# Altium PCB PCB1.PcbDoc
Units mm, origin at the board's own origin, x right, y up, seen from the top; angles counter-clockwise.
Board outline 33.08 x 42.55 mm, 4 copper layers (L1(sig), L2(GND), L3(GND), L4(sig)), stack 1.591 mm thick; 53 components, 42 nets, 205 pads, 117 vias.
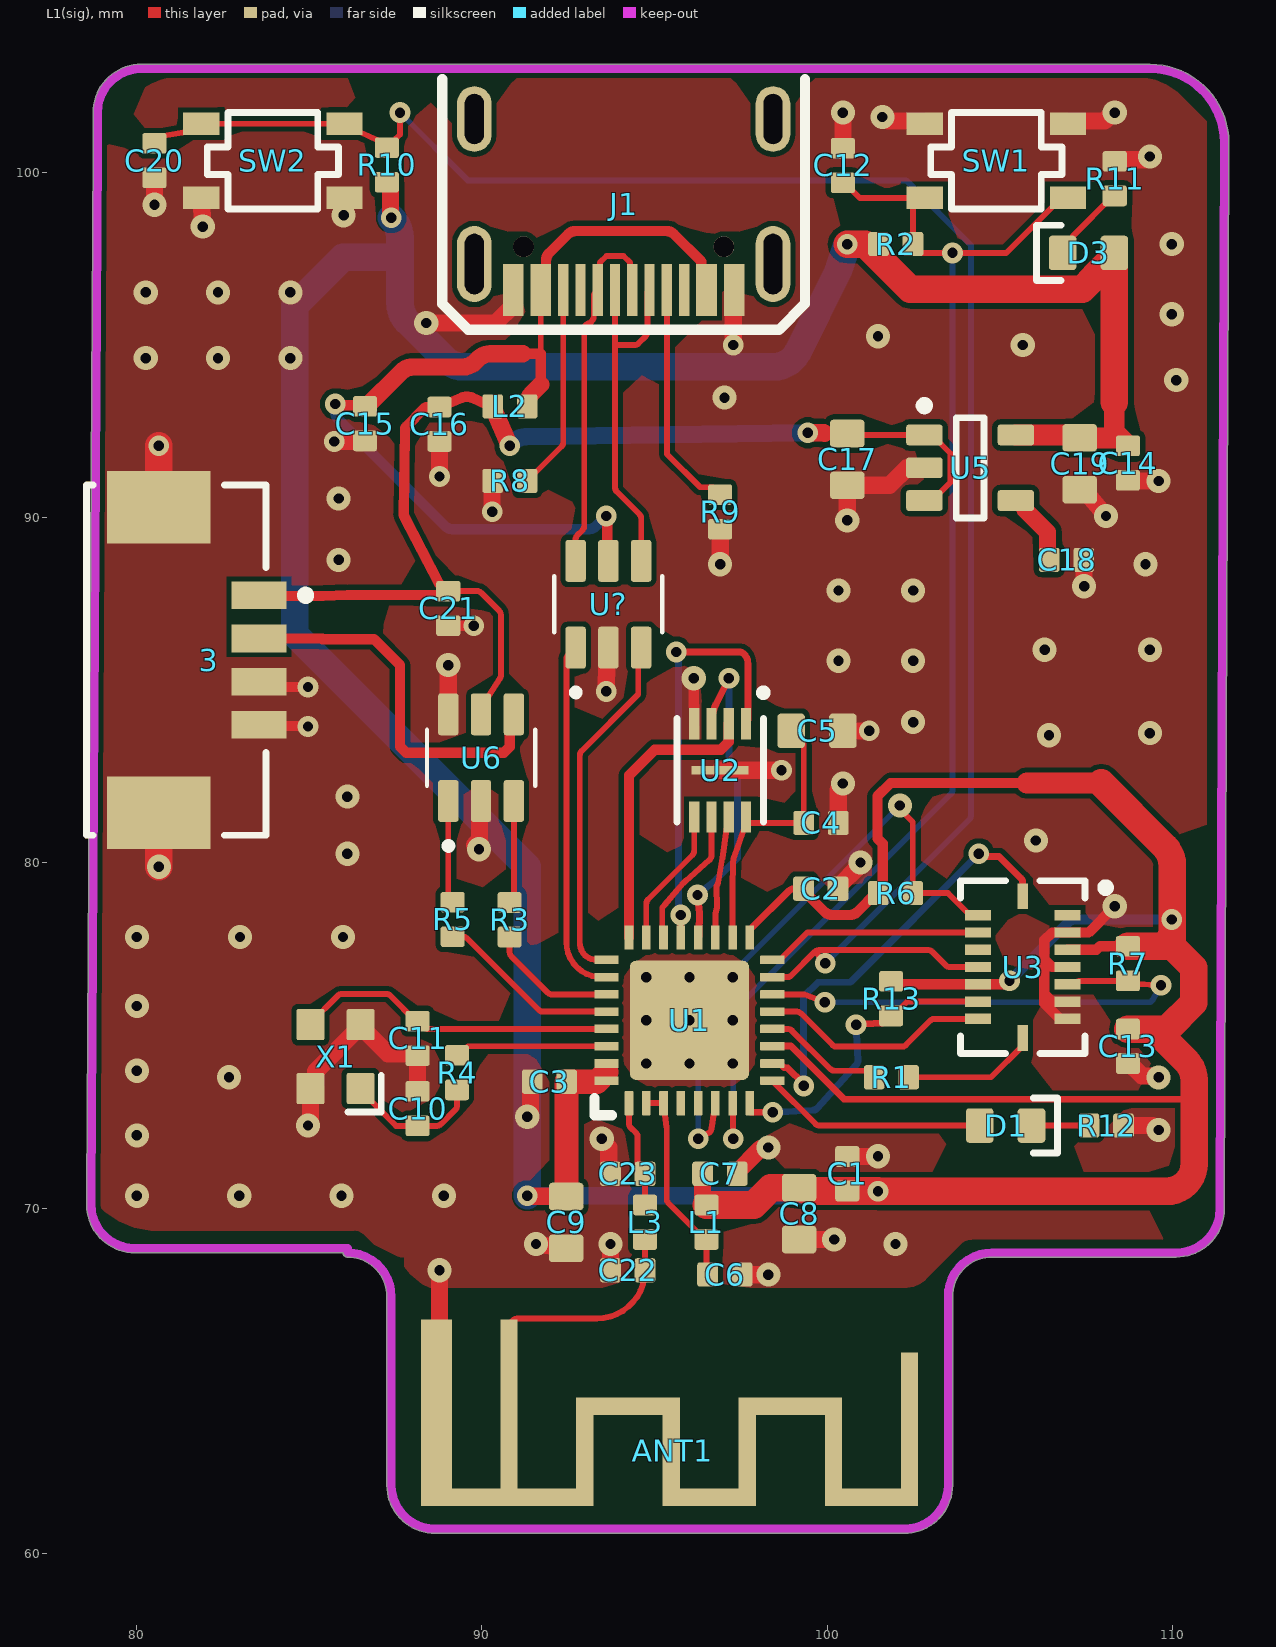
[diagram p0: L1(sig) view]
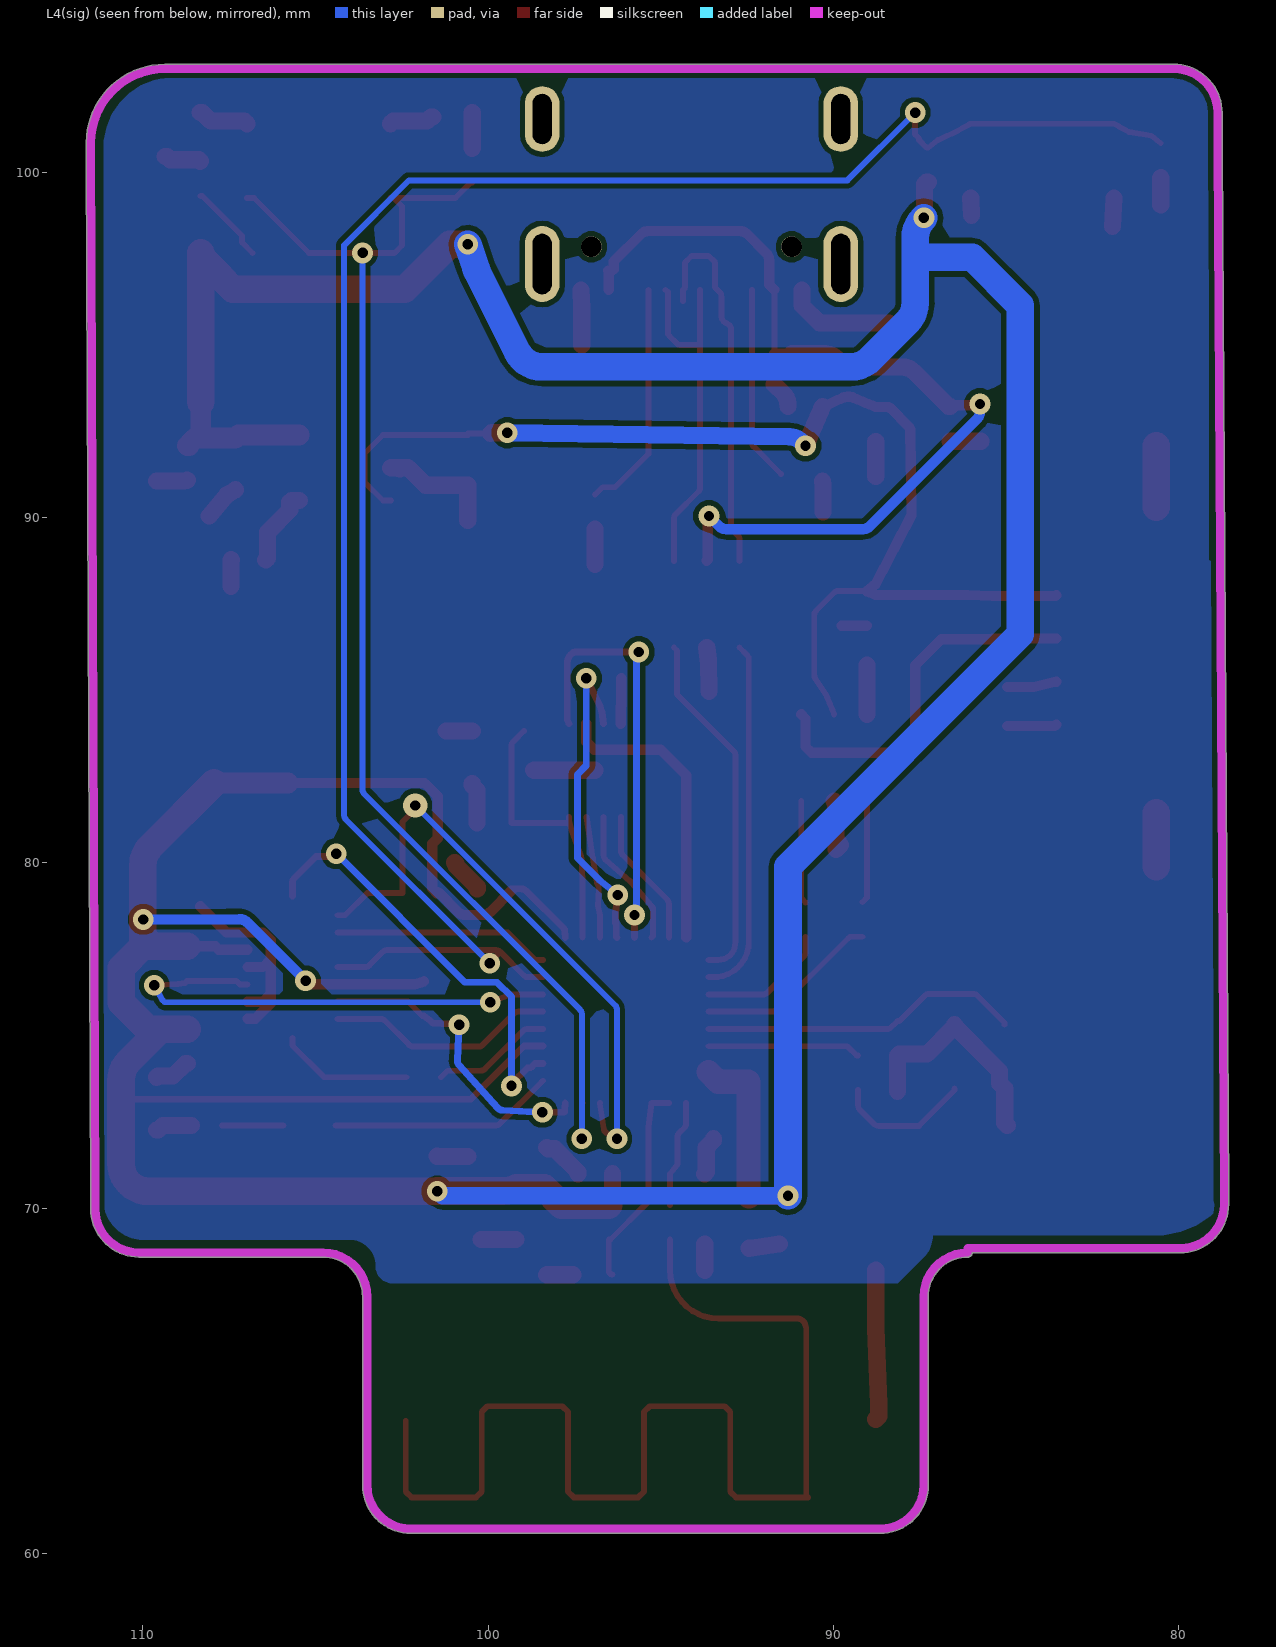
[diagram p1: L4(sig) view, seen from below]
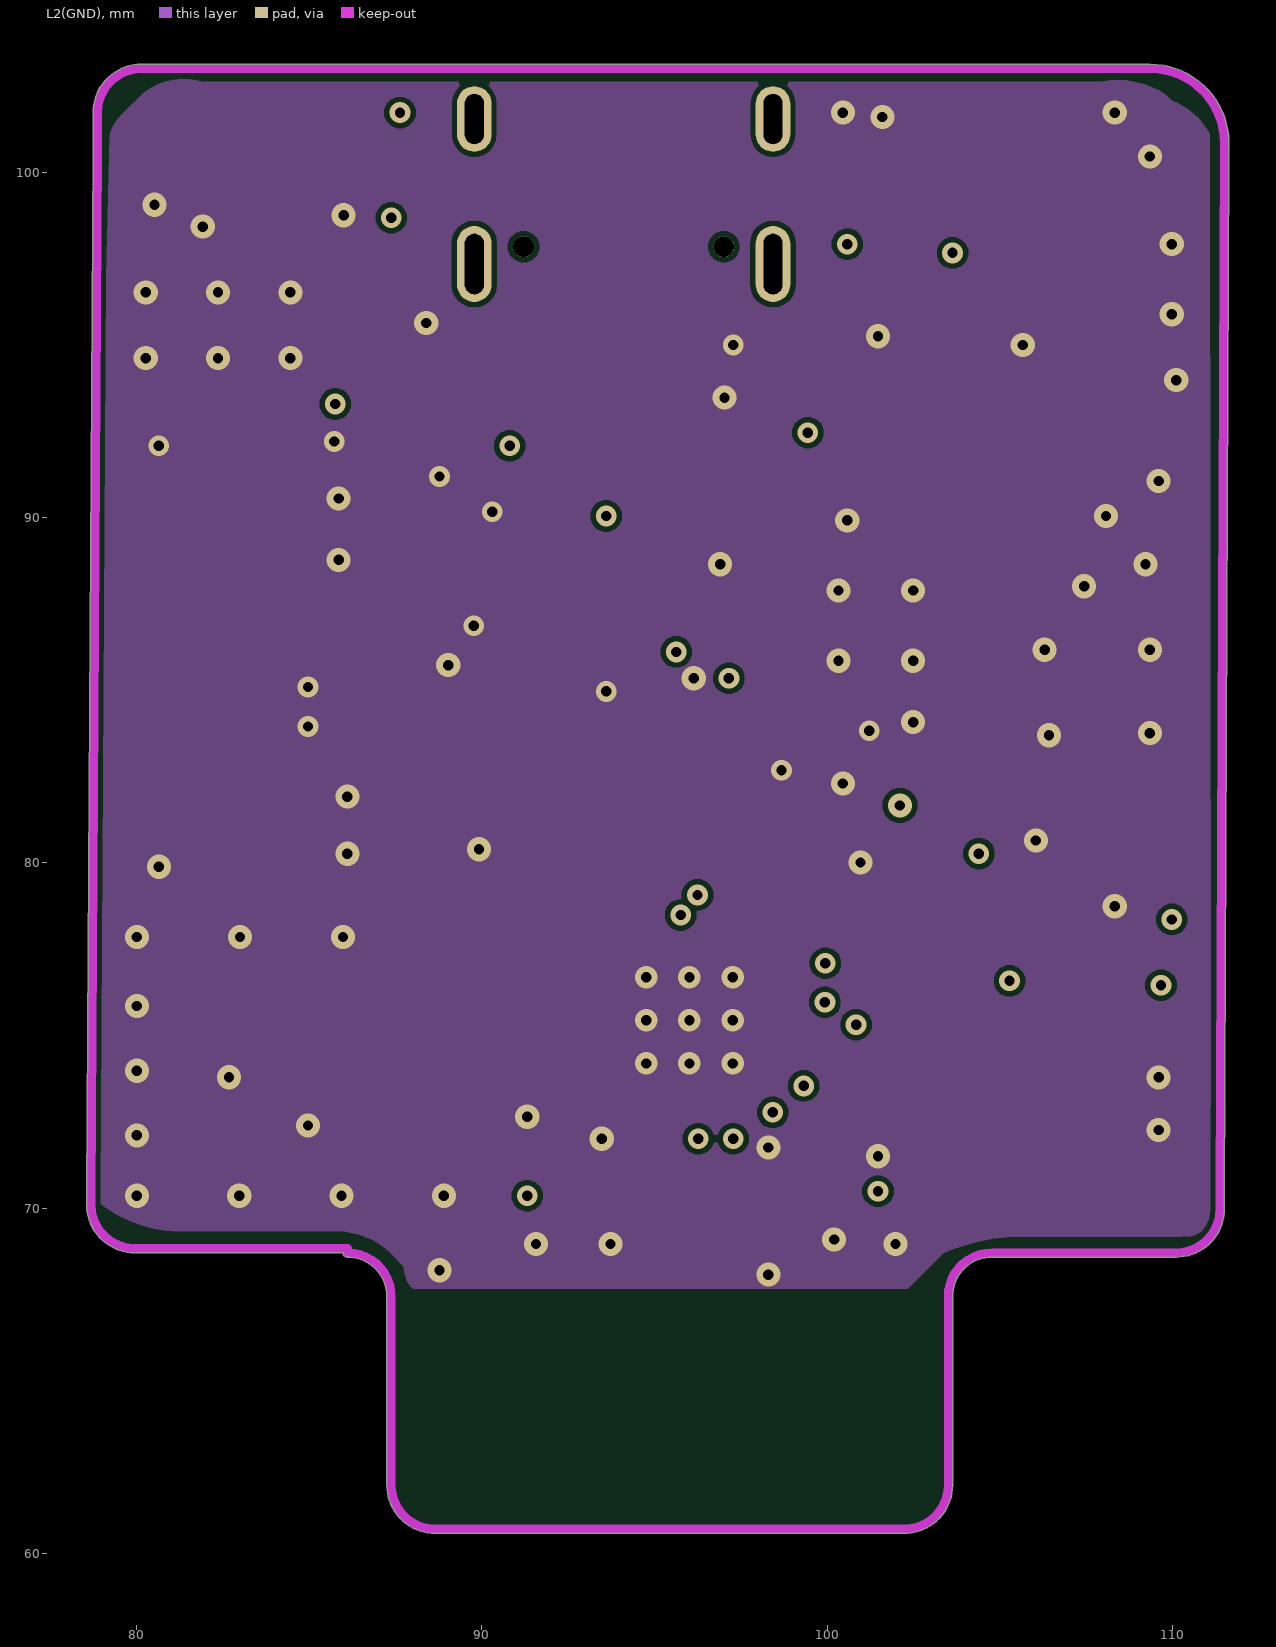
[diagram p2: L2(GND)]
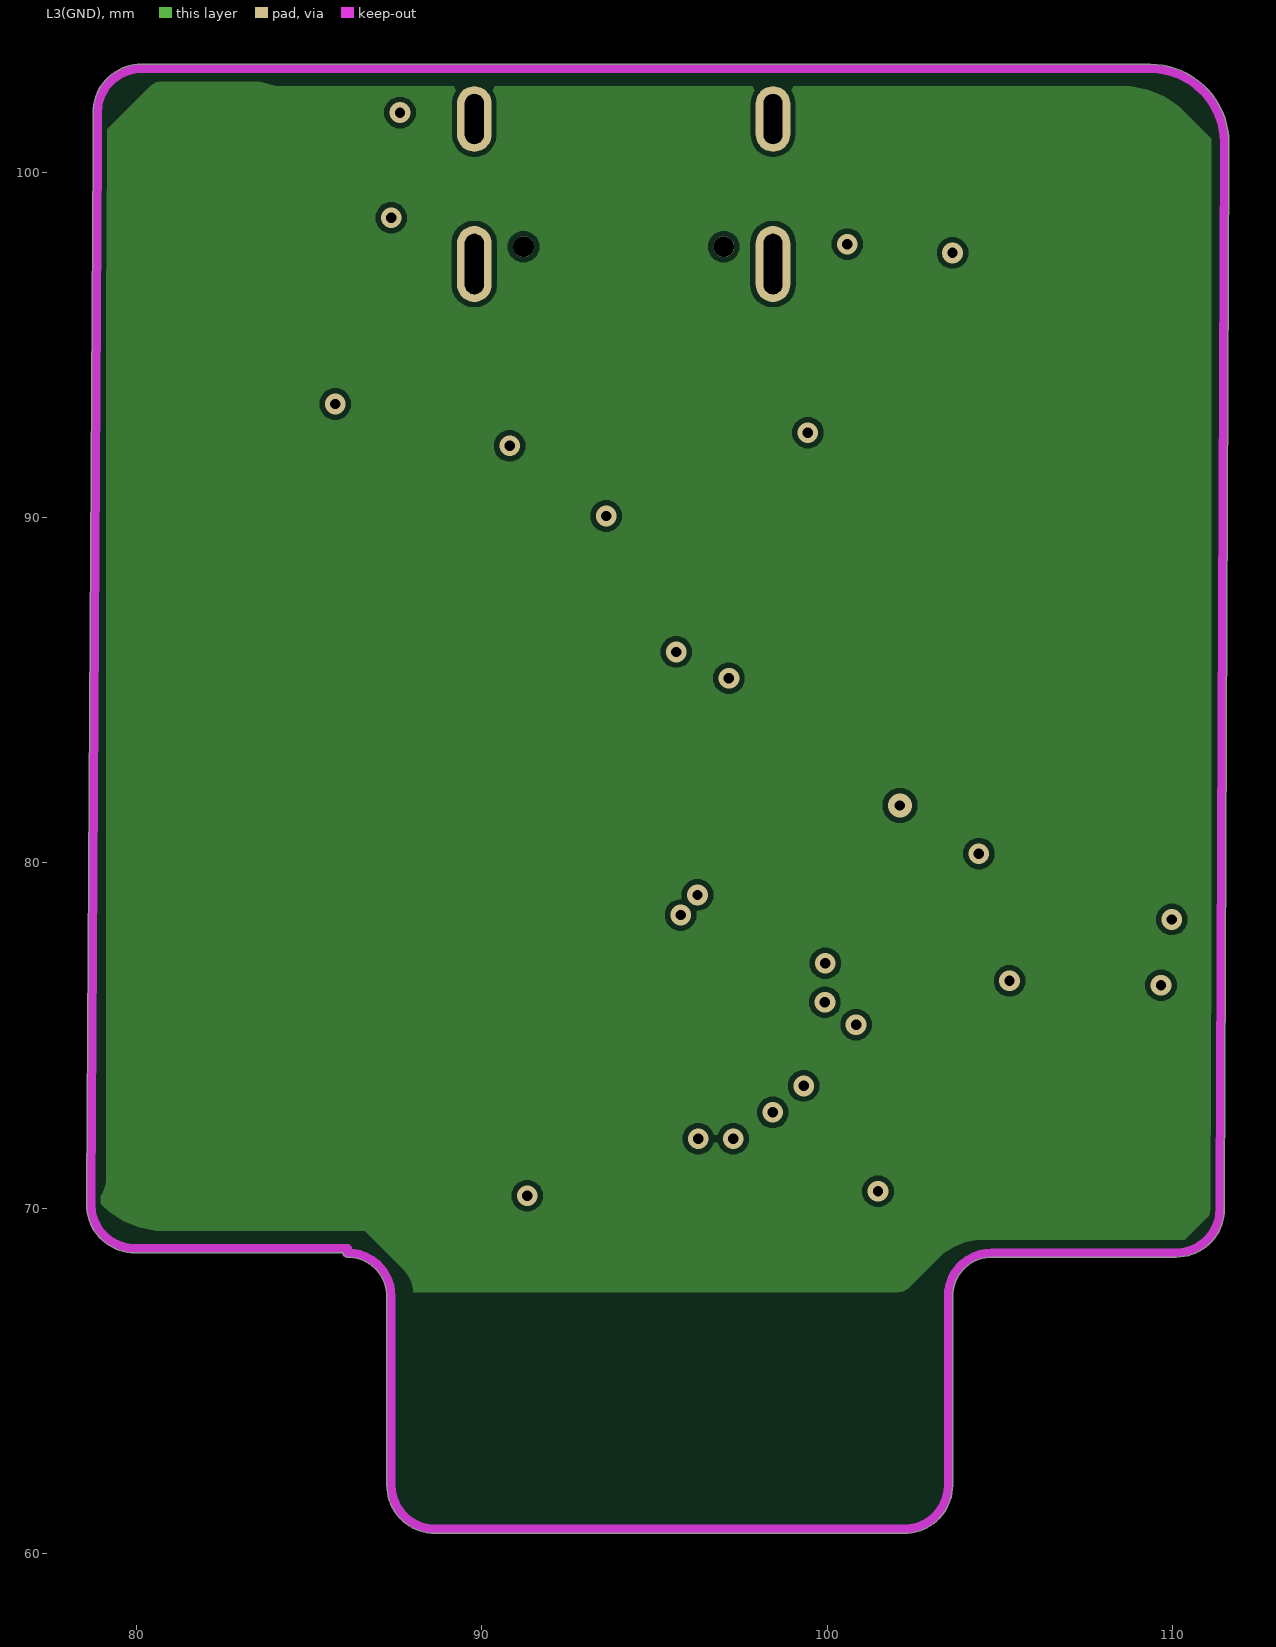
[diagram p3: L3(GND)]
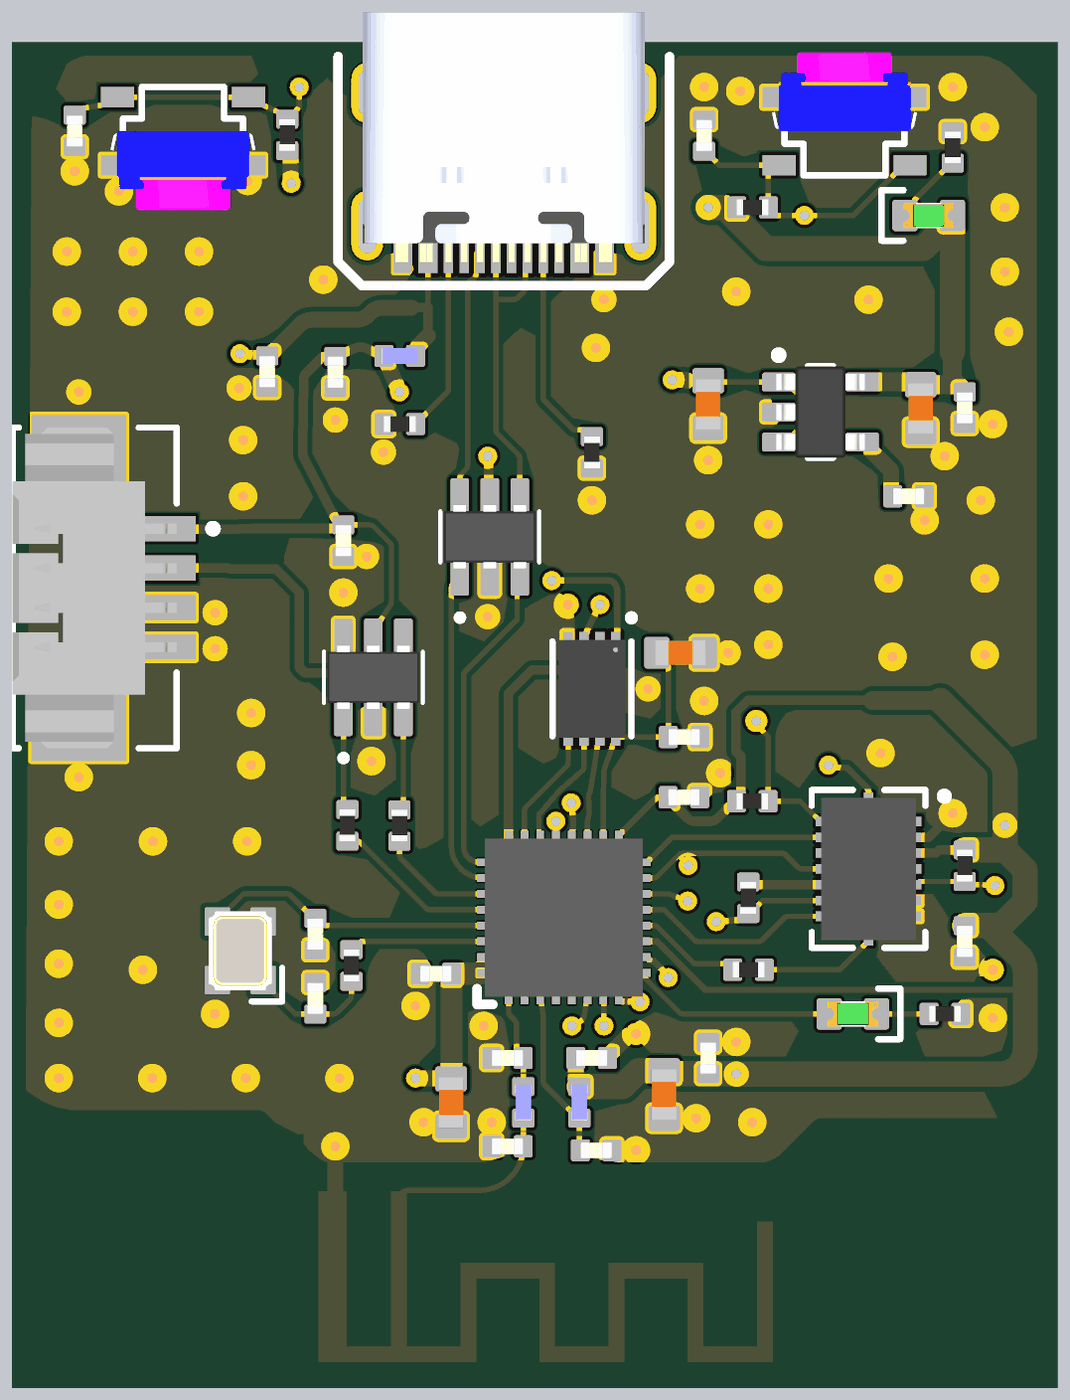
[diagram p4: 3D render of the assembled board from above, using the file's embedded part models]

## Layer stack, top to bottom
Top Solder: solder mask 0.0254, SM-001, Dk 4
L1(sig): signal copper 0.035
Dielectric 1: prepreg 0.2104, PP-017, Dk 4.6
L2(GND): signal copper 0.0175
Dielectric 3: core 1.065, Core-039, Dk 4.6
L3(GND): signal copper 0.0175
Dielectric 5: prepreg 0.2104, PP-017, Dk 4.6
L4(sig): signal copper 0.035
Bottom Solder: solder mask 0.0254, SM-001, Dk 4

## Board outline
79.949,68.707 85.979,68.707 ccw(c86.106,68.707) 86.106,68.58 cw(c86.106,67.437) 87.249,67.437 87.249,61.976 ccw(c88.646,61.976) 88.646,60.579 102.235,60.579 ccw(c102.235,61.976) 103.632,61.976 103.632,67.437 cw(c104.775,67.437) 104.775,68.58 110.108,68.58 ccw(c110.108,69.977) 111.505,69.977 111.505,70.357 111.631,100.434 111.633,100.457 111.633,100.847 ccw(c109.356,100.847) 109.356,103.124 80.137,103.124 ccw(c80.137,101.727) 78.74,101.727 78.74,100.617 78.552,70.42 78.552,70.419 78.552,70.104 ccw(c79.949,70.104)

## Design rules (kind name [scope] priority, off if disabled: settings)
Clearance [All] p1: gap=0.15 ignorepadtopadclearanceinfootprint=FALSE
DiffPairsRouting [All] p1: maxlimit=0.254 minlimit=0.22 mostfreqgap=0.254 toplayer_maxgap=0.22 toplayer_prefgap=0.22 toplayer_minwidth=0.17 toplayer_maxwidth=0.17 toplayer_prefwidth=0.17 midlayer1_mingap=0.254 midlayer1_minwidth=0.381 midlayer1_maxwidth=0.381 midlayer1_prefwidth=0.381 midlayer2_mingap=0.254 midlayer2_minwidth=0.381 midlayer2_maxwidth=0.381 midlayer2_prefwidth=0.381 bottomlayer_maxgap=0.22 bottomlayer_prefgap=0.22 bottomlayer_minwidth=0.17 bottomlayer_maxwidth=0.17 bottomlayer_prefwidth=0.17 maxuncoupledlength=12.7
PolygonConnect [All] p1: connectstyle=Direct reliefconductorwidth=0.254 reliefentries=4 polygonreliefangle="90 Angle" airgapwidth=0.254
RoutingVias [All] p1: holewidth=0.25 width=0.6 viastyle="Through Hole" minholewidth=0.25 minwidth=0.6 maxholewidth=0.4 maxwidth=0.8
SolderMaskExpansion [All] p1: expansion=0.102 istentingtop=FALSE
UnRoutedNet [All] p1: checkbadconnections=TRUE
Width [All] p1: maxlimit=1 minlimit=0.15 preferedwidth=0.2
28 further rules are at their usual default settings.

## Classes and differential pairs
differential pair class DIFF_USB: MCU_USB_D
differential pair class DIFF_USB_2: USB_D
differential pair USB_D: +USB_D_P -USB_D_N
differential pair MCU_USB_D: +MCU_USB_D_P -MCU_USB_D_N

## Components (designator, comment, footprint, x,y, rotation, side; value= is the part's Value field where it differs from the comment)
3 "53261-0471" MOLEX-53261-0471_V 82.095,85.872 r270 top (schematic designator P1)
ANT1 "PCB Antenna 2.4GHz 50Ohm" ANT_IFA_USB_2_4GHZ_50R 88.683,66.772 r0 top
C1 "100n" CAP_0402 100.584,70.993 r270 top
C2 "100n" CAP_0402 99.814,79.248 r180 top
C3 "100n" CAP_0402 91.956,73.66 r0 top
C4 "100n" CAP_0402 99.822,81.153 r180 top
C5 "10u" CAP_0603 99.707,83.82 r180 top
C6 "100n" CAP_0402 97.036,68.072 r180 top
C7 "100n" CAP_0402 96.893,70.993 r180 top
C8 "10u" CAP_0603 99.187,69.838 r90 top
C9 "10u" CAP_0603 92.44,69.584 r90 top
C10 "10P" CAP_0402 88.138,72.882 r270 top
C11 "10P" CAP_0402 88.138,74.914 r90 top
C12 "100n" CAP_0402 100.457,100.195 r270 top
C13 "100n" CAP_0402 108.712,74.684 r90 top
C14 "100n" CAP_0402 108.712,91.575 r90 top
C15 "100n" CAP_0402 86.614,92.718 r90 top
C16 "100n" CAP_0402 88.773,92.702 r90 top
C17 "10u" CAP_0603 100.584,91.682 r90 top
C18 "100n" CAP_0402 106.934,88.773 r180 top
C19 "10u" CAP_0603 107.315,91.555 r90 top
C20 "100n" CAP_0402 80.518,100.338 r90 top
C21 "100n" CAP_0402 89.027,87.368 r270 top
C22 "3p3" CAP_0402 94.226,68.199 r0 top
C23 "3p3" CAP_0402 94.226,70.993 r0 top
D1 "GREEN" LED_0603_GREEN 105.168,72.39 r180 top
D3 "GREEN" LED_0603_GREEN 107.569,97.663 r0 top
J1 "TYPE-C-31-M-12" TYPE-C-31-M-12 94.107,99.441 r180 top
L1 "2n2" IND_0402 96.504,69.588 r90 top
L2 "2n2" IND_0402 90.813,93.218 r180 top
L3 "2n2" IND_0402 94.726,69.588 r90 top
R1 "22R" RES_0402 101.862,73.787 r180 top
R2 "5k1" RES_0402 101.989,97.917 r180 top
R3 "440R" RES_0402 90.805,78.351 r270 top
R4 "22R" RES_0402 89.281,73.922 r270 top
R5 "440R" RES_0402 89.154,78.359 r270 top
R6 "5k" RES_0402 101.981,79.121 r180 top
R7 "5k" RES_0402 108.712,77.081 r90 top
R8 "5k" RES_0402 90.813,91.059 r0 top
R9 "5k" RES_0402 96.901,90.162 r90 top
R10 "5k1" RES_0402 87.249,100.211 r270 top
R11 "1K" RES_0402 108.331,99.814 r270 top
R12 "1K" RES_0402 108.085,72.39 r180 top
R13 "5k" RES_0402 101.854,76.065 r90 top
SW1 "SKRPANE010" SKRPANE010 104.902,100.33 r0 top
SW2 "SKRPANE010" SKRPANE010 83.947,100.33 r180 top
U1 "ESP32-C3" QFN32-5x5 96.012,75.438 r90 top
U2 "W25Q16JVUXIQ" USON-8-2X3MM 96.901,82.677 r270 top
U3 "BMI055" BMI088 105.664,76.98 r270 top
U5 "SPX3819M5-L-3-3/TR" SOT-23-5 104.14,91.44 r0 top
U6 "USBLC6-2SC6" SOT95P280X145-6N 89.977,83.043 r90 top
U? "USBLC6-2SC6" SOT95P280X145-6N 93.665,87.488 r90 top
X1 "40MHZ" XTAL_2520 85.762,74.386 r90 top

## Footprints (in the part's own frame and the unit in brackets; to place one, negate y for a bottom-side part, rotate by r counter-clockwise, add the part's x,y. Pads: shape width x height; smd on the part's side, far side on the other; paste and mask are expansions set on the pad)
ANT_IFA_USB_2_4GHZ_50R [mm]
  rect 5x0.5 smd paste-2539.97 mask+0.102: 1(2.05,-5.15)
  rect 0.5x4.9 smd paste-2539.97 mask+0.102: 1(2.1,-2.45)
  rect 0.5x2.64 smd paste-2539.97 mask+0.102: 1(4.3,-3.58) 1(6.8,-3.58) 1(9,-3.58) 1(11.5,-3.58)
  rect 2x0.5 smd paste-2539.97 mask+0.102: 1(5.55,-2.51) 1(10.25,-2.51)
  rect 2.7x0.5 smd paste-2539.97 mask+0.102: 1(7.9,-5.15) 1(12.6,-5.15)
  rect 0.5x3.94 smd paste-2539.97 mask+0.102: 1(13.7,-2.93)
  rect 0.9x4.9 smd paste-2539.97 mask+0.102: 2(0,-2.45)
BMI088 [mm]
  rect 0.3x0.75 smd: 1(-1.5,1.3) 2(-1,1.3) 3(-0.5,1.3) 4(0,1.3) 5(0.5,1.3) 6(1,1.3) 7(1.5,1.3) 9(1.5,-1.3) 10(1,-1.3) 11(0.5,-1.3) 12(0,-1.3) 13(-0.5,-1.3) 14(-1,-1.3) 15(-1.5,-1.3)
  rect 0.75x0.3 smd: 8(2.05,0) 16(-2.05,0)
  silkscreen extent -2.5,-1.8 2.5,2.51, body extent -2.25,-1.5 2.25,1.5, height 1.01
CAP_0402 [mm]
  rrect25% 0.6x0.7 smd: 1(-0.5,0) 2(0.5,0)
  body extent -0.5,-0.26 0.5,0.26, height 0.37
CAP_0603 [mm]
  rrect25% 0.8x1 smd: 1(-0.75,0) 2(0.75,0)
  body extent -0.8,-0.4 0.8,0.4, height 0.51
IND_0402 [mm]
  rrect25% 0.6x0.7 smd: 1(-0.5,0) 2(0.5,0)
  body extent -0.56,-0.26 0.56,0.26, height 0.67
LED_0603_GREEN [mm]
  rrect25% 0.8x1 smd: A(0.75,0) K(-0.75,0)
  silkscreen extent -1.5,-0.8 -0.8,0.8, body extent -0.8,-0.4 0.8,0.4, height 0.6
MOLEX-53261-0471_V [mm] "SMD, 4-Leads, Body 10.15x5.2mm, Pitch 1.25mm"
  rect 0.8x1.6 smd: 1(-1.875,1.45) 2(-0.625,1.45) 3(0.625,1.45) 4(1.875,1.45)
  rect 2.1x3 smd: MP1(-4.425,-1.45) MP2(4.425,-1.45)
  silkscreen extent -5.08,-3.55 5.08,2.93, body extent -5.08,-3.55 5.07,1.65, height 3.4
QFN32-5x5 [mm]
  rrect10% 0.7x0.25 smd mask+0.05: 1(-2.4,1.75) 2(-2.4,1.25) 3(-2.4,0.75) 4(-2.4,0.25) 5(-2.4,-0.25) 6(-2.4,-0.75) 7(-2.4,-1.25) 8(-2.4,-1.75) 17(2.4,-1.75) 18(2.4,-1.25) 19(2.4,-0.75) 20(2.4,-0.25) 21(2.4,0.25) 22(2.4,0.75) 23(2.4,1.25) 24(2.4,1.75)
  rrect10% 0.25x0.7 smd mask+0.05: 9(-1.75,-2.4) 10(-1.25,-2.4) 11(-0.75,-2.4) 12(-0.25,-2.4) 13(0.25,-2.4) 14(0.75,-2.4) 15(1.25,-2.4) 16(1.75,-2.4) 25(1.75,2.4) 26(1.25,2.4) 27(0.75,2.4) 28(0.25,2.4) 29(-0.25,2.4) 30(-0.75,2.4) 31(-1.25,2.4) 32(-1.75,2.4)
  rrect10% 3.45x3.45 smd mask+0.07: 33(0,0)
  silkscreen extent -2.75,2.25 -2.25,2.75, body extent -2.5,-2.5 2.5,2.5, height 0.85
RES_0402 [mm]
  rrect25% 0.6x0.7 smd: 1(-0.5,0) 2(0.5,0)
  body extent -0.5,-0.25 0.5,0.25, height 0.3
SKRPANE010 [mm]
  rect 1.05x0.65 smd: 12(-2.075,1.075) 12(2.075,1.075) 34(-2.075,-1.075) 34(2.075,-1.075)
  silkscreen extent -1.9,-1.4 1.9,1.4, body extent -2.3,-1.6 2.3,1.6, height 2.51
SOT95P280X145-6N [mm]
  rrect25% 1.21x0.59 smd: 1(-1.255,0.95) 2(-1.255,0) 3(-1.255,-0.95) 4(1.255,-0.95) 5(1.255,0) 6(1.255,0.95)
  silkscreen extent -2.65,-1.57 0.81,1.57, body extent -1.4,-1.46 1.4,1.46, height 0.4
SOT-23-5 [mm] "SOT23, 5-Leads, Body 2,90x2,80mm, Pitch 0,95mm, IPC Medium Density"
  rrect25% 1.05x0.6 smd: 1(-1.325,0.95) 2(-1.325,0) 3(-1.325,-0.95) 4(1.325,-0.95) 5(1.325,0.95)
  silkscreen extent -1.45,-1.45 0.4,1.92, body extent -1.4,-1.45 1.4,1.45, height 1.45
TYPE-C-31-M-12 [mm]
  rect 0.6x1.5 smd mask+0.07: A1B12(-3.2,2.85) B1A12(3.2,2.85)
  rect 0.6x1.5 smd mask+0.14: A4B9(-2.4,2.85) B4A9(2.4,2.85)
  rect 0.3x1.5 smd mask+0.14: A5(-1.25,2.85) A6(-0.25,2.85) A7(0.25,2.85) A8(1.25,2.85) B5(1.75,2.85) B6(0.75,2.85) B7(-0.75,2.85) B8(-1.75,2.85)
  round 0.6 hole 0.6 unplated mask+0.3: MH(-2.9,1.6) MH(2.9,1.6)
  oval 1x1.9 hole 0.55 slot 1.45 at 90 deg mask+0.05: SH(-4.325,-2.1) SH(4.325,-2.1)
  oval 1x2.2 hole 0.55 slot 1.75 at 90 deg mask+0.05: SH(-4.325,2.1) SH(4.325,2.1)
  silkscreen extent -5.25,-3.25 5.25,4, body extent -4.47,-4.65 4.47,3.25, height 3.32
USON-8-2X3MM [mm]
  rect 0.9x0.3 smd mask+0.13: 1(-1.35,0.75) 2(-1.35,0.25) 3(-1.35,-0.25) 4(-1.35,-0.75) 5(1.35,-0.75) 6(1.35,-0.25) 7(1.35,0.25) 8(1.35,0.75)
  rect 0.25x1.65 smd paste-0.1: 9(0,0)
  silkscreen extent -2.35,-1.25 1.5,1.35, body extent -1.55,-1.05 1.55,1.05, height 0.61
XTAL_2520 [mm]
  rrect10% 0.9x0.8 smd mask+0: 1(-0.925,-0.725) 2(0.925,-0.725) 3(0.925,0.725) 4(-0.925,0.725)
  silkscreen extent -1.6,-1.33 -0.54,-0.36, body extent -1.25,-1 1.25,1, height 0.8

## Part data
3: library part CMP-2000-05238-1, "Male Header, Pitch 1.25 mm, 1 x 4 Position, Height 3.4 mm, -40 to 85 degC, RoHS, Tape and Reel", Current Rating=1A, Manufacturer=Molex, Package Description="1.25mm Pitch PicoBlade(TM) Header, Surface Mount, Right Angle, Lead-Free, 4 Circuits", Voltage Rating=125V, Brand=Molex, Contact Material=PhosphorBronze, Contact Plating=Tin, Datasheet URL=http://www.molex.com/pdm_docs/sd/532610471_sd.pdf, Datasheet Version="Rev. G, 01/2012", Factory Pack Quantity=1000, Housing Material=Thermoplastic, Manufacturer URL=http://www.molex.com/, Mounting Angle=Right, Mounting Style=SMD/SMT, Number of Positions=4, Number of Positions / Contacts=4, Number of Rows=1, Packaging=Reel, Pitch=1.25mm, Product Category=Headers&WireHousings, Product Type=Headers, RoHS=Details, Series=53261, Termination Style=SMD, Tradename=PicoBlade, Type=Shrouded
ANT1: library part ANT_IFA_USB_2_4GHZ_50R, "Inverted F 2.4GHz ISM PCB Antenna 50 Ohm", ComponentLink1Description=Datasheet, ComponentLink1URL=https://www.ti.com/lit/an/swra117d/swra117d.pdf
C1 C2 C3 C4 C6 C7 C10 C11 C12 C13 C14 C15 C16 C18: library part CAP_0402, "Capacitor SMD 0402"
C5 C8 C9: library part CAP_0603, "Capacitor SMD 0603"
C17 C19: library part CAP_0603_10V, "Capacitor SMD 0603 10V", LCSC=C19702, Manufacturer=Samsung, Manufacturer Part Number=CL10A106KP8NNNC
C20 C21: library part CAP_0402_50V, "Capacitor SMD 0402 50V", LCSC=C1525, Manufacturer=Samsung, Manufacturer Part Number=CL05B104KO5NNNC
C22 C23: library part CAP_0402_50V, "Capacitor SMD 0402 50V", LCSC=C1565, Manufacturer=FH, Manufacturer Part Number=0402CG3R3C500NT
D1 D3: library part LED_0603_GREEN, "LED 0603 GREEN SMD", LCSC=C72043
J1: "USB Type C Connector Horizontal SMT", Manufacturer="Koren Hroparts", Manufacturer Part Number=TYPE-C-31-M-12
L1 L2: library part IND_0402, "Inductor SMD 0402"
L3: library part IND_0402, "Inductor SMD 0402", LCSC=C412264, Manufacturer=Murata, Manufacturer Part Number=LQW15AN2N2G80D
R1 R2 R3 R4 R5 R6 R7 R8 R9 R11 R12 R13: library part RES_0402, "Resistor SMD 0402"
R10: library part RES_0402, "Resistor SMD 0402", LCSC=C105873, Manufacturer=YAGEO, Manufacturer Part Number=RC0402JR-075K1L
SW1: "Tactile Switch SMD SPST", Manufacturer="Alps Alpine", Manufacturer Part Number=SKRPANE010
SW2: "Tactile Switch SMD SPST", LCSC=C470426, Manufacturer="Alps Alpine", Manufacturer Part Number=SKRPANE010
U1: "Ultra­Low­Power SoC with RISC­V Single­Core CPU Supporting IEEE 802.11b/g/n (2.4 GHz Wi­Fi) and Bluetooth® 5 (LE)", LCSC=C2838500, Manufacturer=Espressif, Manufacturer Part Number=ESP32-C3
U2: "16M-BIT SERIAL FLASH MEMORY WITH DUAL/QUAD SPI USON-8", LCSC=C2843335, Manufacturer=Winbond, Manufacturer Part Number=W25Q16JVUXIQ
U3: "Inertial Measurement Unit IMU 6-Axis LGA", LCSC=C189620, Manufacturer=Bosch, Manufacturer Part Number=BMI055
U5: "500mA +3.3V Low-Noise LDO Voltage Regulator", Manufacturer=MaxLinear, Manufacturer Part Number=SPX3819M5-L-3-3/TR
U6 U?: "17V Clamp 5A (8/20Âµs) Ipp Tvs Diode Surface Mount SOT-23-6", Package="SOT-23-6 STMicroelectronics", Availability="In Stock", Check_prices=https://www.snapeda.com/parts/USBLC6-2SC6/STMicroelectronics/view-part/?ref=eda, MF=STMicroelectronics, MP=USBLC6-2SC6, Price=None, Purchase-URL=https://pricing.snapeda.com/search/part/USBLC6-2SC6/?ref=eda, SnapEDA_Link=https://www.snapeda.com/parts/USBLC6-2SC6/STMicroelectronics/view-part/?ref=snap
X1: library part XTAL_2520, "Crystal SMD 2520"

## Via types
v1: diameter 0.7, hole 0.3, L1(sig) to L2(GND), 71 vias
v2: diameter 0.6, hole 0.3, L1(sig) to L4(sig), 25 vias
v3: diameter 0.6, hole 0.3, L1(sig) to L2(GND), 11 vias
v4: diameter 0.65, hole 0.3, L1(sig) to L2(GND), tented both sides, 9 vias
v5: diameter 0.7, hole 0.3, L1(sig) to L4(sig), 1 vias

## Nets (pads, with @x,y where several pads share a name; then routed paths per layer and width w, separated by ;. In a path a pad name is that pad's centre, name@x,y a point inside that pad or via, vN(x,y) a via of type N, cw(c..) or ccw(c..) an arc to the next point about the centre after c; other vN are vias at no path point)
+3V3: C1.2 C2.2 C3.2 C7.2 C8.2 C9.2 C13.2 C14.2 C19.2 D3.A L1.2 R2.2 R6.2 R7.2 R10.2 R13.2 U1.11 U1.17 U1.31 U1.32 U3.3 U3.11 U5.5 | length 155.3
  L1(sig) w0.17: L1.2@96.393,70.199 L1.2
  L1(sig) w0.2: U1.17 97.787,78.076 98.901,79.19 cw(c99.042,79.048) 99.042,79.248 C2.2 ; U1.11 98.955,74.688 100.491,73.152 110.628,73.152
  L1(sig) w0.3: C2.2@99.314,79.198 99.938,78.574 ; 99.939,78.573 ccw(c100.15,78.786) 100.15,78.486 100.653,78.486 ccw(c100.653,78.786) 100.865,78.574 R6.2@101.447,79.155 ; R6.2 101.615,79.255 101.615,80.547 101.458,80.704 101.458,81.93 101.839,82.311 105.791,82.311 ; R13.2 102.119,76.48 U3.11 105.101,76.48 105.202,76.581 v2(105.283,76.581) ; U3.3 107.8,77.48 107.901,77.581 R7.2 ; 109.474,77.581 v2(109.982,78.359)
  L1(sig) w0.5: R10.2 87.299,99.711 87.349,99.661 87.349,99.611 87.357,99.603 87.357,98.698 v2(87.376,98.679) ; v2(91.313,70.358) 91.325,70.346 92.428,70.346 C9.2 ; L1.2@96.393,70.199 C7.2
  L1(sig) w0.6: U5.5 107.23,92.39 C19.2 C14.2@108.432,92.305 ; 105.791,82.311 107.935,82.311 ; 108.319,93.345 108.319,92.468 108.662,92.125 108.662,92.075 C14.2
  L1(sig) w0.7: C9.2 92.456,70.35 C3.2 93.334,73.66 93.612,73.938
  L1(sig) w0.8: L1.2 97.872,70.088 98.372,70.588 C8.2 ccw(c99.565,71.293) 99.566,70.493 C1.2 101.465,70.493 v2(101.473,70.485) 109.828,70.485 ccw(c109.828,71.285) 110.628,71.285 110.628,73.152 110.628,73.699 ccw(c109.828,73.699) 110.394,74.264 109.474,75.184 ; v2(100.584,97.917) 101.105,97.917 102.409,96.613 107.388,96.613 107.769,96.994 107.769,97.013 D3.A@108.319,97.563 ; 107.935,82.311 109.764,80.482 cw(c109.198,79.917) 109.998,79.917 109.998,77.581 ; 108.319,93.345 D3.A@108.319,97.563 ; D3.A D3.A@108.319,97.563 ; C13.2 109.474,75.184 ; R7.2 109.474,77.581 109.998,77.581 ; 109.474,75.184 109.855,75.184 110.617,75.946 110.617,76.962 109.998,77.581
  L4(sig) w0.3: v2(105.283,76.581) 106.979,78.277 cw(c107.191,78.064) 107.191,78.364 v2(109.982,78.359)
  L4(sig) w0.5: v2(91.313,70.358) 101.319,70.358 101.446,70.485 v2(101.473,70.485)
  L4(sig) w0.8: v2(87.376,98.679) 87.395,98.66 cw(c86.83,98.094) 87.63,98.094 87.63,97.536 ; v2(91.313,70.358) 91.313,79.883 84.582,86.614 84.582,96.139 85.979,97.536 87.63,97.536 ; v2(100.584,97.917) 100.351,97.223 cw(c99.592,97.476) 100.309,97.121 100.309,97.12 99.155,94.804 cw(c98.439,95.161) 98.439,94.361 89.483,94.361 cw(c89.485,95.161) 88.922,94.593 87.864,95.651 87.863,95.652 cw(c88.43,96.216) 87.63,96.216 87.63,97.536
+3V3_RF: C6.2 L1.1 U1.2 U1.3 | length 6
  L1(sig) w0.17: U1.2 U1.3 95.352,72.347 cw(c95.184,72.325) 95.354,72.325 95.354,70.259 ccw(c95.524,70.259) 95.403,70.139 ; 95.403,70.139 96.454,69.088 L1.1 96.504,68.183 cw(c96.393,68.183) C6.2@96.393,68.072
+VBUS: C15.2 J1.A4B9 J1.B4A9 L2.1 U?.5 | length 28.3
  L1(sig) w0.17: 91.707,94.746 J1.B4A9@91.707,96.645
  L1(sig) w0.2: 91.186,94.742 91.19,94.746
  L1(sig) w0.3: v2(85.753,93.288) 85.788,93.253 86.579,93.253 C15.2 ; 91.19,94.746 91.707,94.746 91.707,93.853 ; J1.B4A9 91.857,96.741 91.857,97.448 cw(c92.157,97.448) 91.944,97.659 92.496,98.211 cw(c92.707,97.998) 92.707,98.298 95.35,98.298 cw(c95.35,97.998) 95.562,98.21 96.357,97.415 96.357,97.191 96.393,97.155 96.52,97.155 96.507,97.142 J1.A4B9 ; v2(93.599,90.043) 93.632,90.01 93.632,88.776 U?.5
  L1(sig) w0.5: C15.2 86.664,93.218 87.661,94.215 cw(c88.014,93.861) 88.014,94.361 89.455,94.361 ccw(c89.455,94.861) 89.808,94.507 89.897,94.596 cw(c90.25,94.242) 90.25,94.742 91.186,94.742 ; L2.1 91.317,93.318 cw(c91.813,93.252) 91.459,93.605 91.707,93.853
  L4(sig) w0.3: v2(85.753,93.288) 85.753,93.059 ccw(c86.053,93.06) 85.84,92.849 88.94,89.749 ccw(c89.151,89.962) 89.15,89.662 93.094,89.662 ccw(c93.094,89.962) 93.305,89.749 v2(93.599,90.043)
+VBUS_FILT: 3.1 C16.2 C17.2 C21.1 L2.2 U5.1 U5.3 U6.5 | length 34.5
  L1(sig) w0.17: C21.1 89.862,87.868 cw(c89.862,87.698) 89.981,87.819 90.501,87.299 cw(c90.381,87.179) 90.551,87.179 90.551,85.432 cw(c90.381,85.432) 90.524,85.339 90.187,84.818 U6.5 ; 99.925,92.432 C17.2 ; C17.2@100.584,92.39 U5.1 103.04,92.39 103.575,91.855 103.575,91.025 103.04,90.49 U5.3
  L1(sig) w0.3: 3.1 83.565,87.727 85.397,87.727 86.112,87.755 88.762,87.755 C21.1 88.762,88.083 87.754,90.03 ; 87.754,90.032 cw(c87.905,90.109) 87.735,90.111 87.774,92.53 cw(c87.944,92.527) 87.823,92.646 88.32,93.149 cw(c88.441,93.03) 88.44,93.2 88.508,93.2 C16.2 88.973,93.285 89.416,93.47 cw(c89.532,93.194) 89.532,93.494 89.599,93.494 cw(c89.599,93.194) 89.722,93.467 90.163,93.269 L2.2@90.293,93.21
  L1(sig) w0.5: L2.2 90.356,93.118 90.804,92.076 ccw(c91.264,92.274) v2(90.805,92.075) ; v2(99.441,92.456) 99.901,92.456 99.925,92.432
  L4(sig) w0.5: v2(90.805,92.075) 90.915,92.188 cw(c91.273,91.839) 91.266,92.339 v2(99.441,92.456)
+VCC_SPI: C4.2 C5.2 U1.18 U2.8 | length 8.1
  L1(sig) w0.17: U1.18 97.262,79.248 cw(c97.432,79.248) 97.262,79.251 97.277,80.02 cw(c97.762,80.01) 97.305,80.172 97.586,80.962 U2.8@97.651,81.218 ; U2.8 U2.8@97.651,81.218 ; C5.2 99.257,83.52 99.273,83.504 cw(c99.152,83.385) 99.322,83.385 C4.2 97.716,81.153 U2.8@97.651,81.218
ANT_RF: ANT1.1 C22.2 L3.1 | length 34.3
  L1(sig) w0.17: L3.1 C22.2 cw(c93.329,68.199) 93.329,66.802 91.059,66.802 ccw(c91.059,66.526) 90.835,66.687 90.783,66.526 90.783,64.322 90.783,61.672 90.733,61.622 92.818,61.622 92.983,61.787 92.983,63.192 92.983,64.097 93.148,64.262 94.233,64.262 95.318,64.262 95.483,64.097 95.483,63.192 95.483,61.787 95.648,61.622 96.583,61.622 97.518,61.622 97.683,61.787 97.683,63.192 97.683,64.097 97.848,64.262 98.933,64.262 100.018,64.262 100.183,64.097 100.183,63.192 100.183,61.787 100.348,61.622 101.283,61.622 102.218,61.622 102.383,61.787 ANT1.1@102.383,63.842
CHIP_EN: C12.2 R2.1 SW1.34 U1.7 | length 38.6
  L1(sig) w0.17: U1.7 97.272,73.028 97.272,72.019 v2(97.282,72.009) ; C12.2 100.507,99.695 100.947,99.255 SW1.34@102.729,99.255 ; SW1.34@102.827,99.255 SW1.34@102.729,99.255 ; SW1.34@106.977,99.255 106.777,99.255 105.185,97.663 v2(103.632,97.663) 102.704,97.663 102.489,97.878 R2.1 102.489,99.015 SW1.34@102.729,99.255
  L4(sig) w0.17: v2(97.282,72.009) 97.282,75.622 cw(c97.452,75.622) 97.331,75.741 103.583,81.993 ccw(c103.462,82.112) 103.632,82.112 v2(103.632,97.663)
FSPI_CLK: R1.1 U3.8 | length 3.9
  L1(sig) w0.17: R1.1 104.746,73.787 105.664,74.705 U3.8
FSPI_D: U1.13 U3.9 | length 6.7
  L1(sig) w0.17: U1.13 99.121,75.688 cw(c99.121,75.518) 99.241,75.638 100.153,74.726 ccw(c100.273,74.846) 100.273,74.676 102.165,74.676 ccw(c102.165,74.846) 102.285,74.726 102.99,75.431 cw(c103.109,75.31) 103.109,75.48 U3.9
FSPI_NCS: U1.16 U3.14 | length 6.3
  L1(sig) w0.17: U1.16 98.637,77.188 99.427,77.978 103.219,77.978 103.221,77.98 U3.14
FSPI_NCS2: R7.1 U1.14 U3.5 | length 14.4
  L1(sig) w0.17: U1.14 99.302,76.188 cw(c99.302,76.018) 99.362,76.177 v2(99.935,75.96) ; U3.5 107.189,76.48 107.29,76.581 R7.1 108.775,76.517 108.977,76.486 v2(109.668,76.455)
  L4(sig) w0.17: v2(99.935,75.96) 109.361,75.96 109.411,76.01 ccw(c109.29,76.13) 109.437,76.044 ccw(c109.29,76.13) 109.439,76.046 v2(109.668,76.455)
FSPI_Q1: R6.1 U1.6 U3.15 | length 18.2
  L1(sig) w0.17: v2(96.266,72.009) 96.564,72.172 ccw(c96.482,72.321) 96.65,72.295 96.722,72.773 U1.6 ; v5(102.108,81.661) 102.108,81.551 102.481,81.178 R6.1 103.498,79.121 104.139,78.48 U3.15
  L4(sig) w0.17: v2(96.266,72.009) 96.266,75.748 cw(c96.436,75.748) 96.316,75.868 v5(102.108,81.661)
FSPI_Q2: R13.1 U1.8 U3.10 | length 8.8
  L1(sig) w0.17: R13.1 101.904,75.565 102.319,75.98 U3.10
  L1(sig) w0.2: U1.8 97.787,72.788 v2(98.425,72.771) ; v2(100.838,75.311) 101.604,75.365 R13.1
  L4(sig) w0.2: v2(98.425,72.771) 99.582,72.832 ccw(c99.572,73.032) 99.72,72.898 100.838,74.14 ccw(c100.689,74.274) 100.889,74.284 v2(100.838,75.311)
GND: 3.3 3.4 3.MP1 3.MP2 ANT1.2 C1.1 C2.1 C3.1 C4.1 C5.1 C6.1 C7.1 C8.1 C9.1 C10.1 C11.1 C12.1 C13.1 C14.1 C15.1 C16.1 C17.1 C18.1 C19.1 C20.1 C21.2 C22.1 C23.1 J1.A1B12 J1.B1A12 R8.1 R9.1 R11.1 R12.1 SW1.12 SW2.12 U1.33 U2.4 U2.9 U3.2 U3.4 U3.6 U3.7 U5.2 U6.2 U6.6 U?.2 X1.2 X1.4 | length 66.6
  L1(sig) w0.3: 3.4 83.58,83.962 v3@84.963,83.962 ; 3.3 84.195,85.09 v3(84.963,85.09) ; C21.2 v3(89.762,86.868) ; v1(96.139,85.344) 96.139,84.544 96.151,84.532 U2.4 ; U3.7 106.739,75.48 106.289,75.93 106.289,76.206 ; U3.6 106.515,75.98 106.289,76.206 ; U3.4 106.515,76.98 106.289,77.206 ; v1(108.331,78.74) 107.571,77.98 U3.2 106.515,77.98 106.289,77.754 106.289,77.206 ; 106.289,76.206 106.289,77.206
  L1(sig) w0.5: v1(80.518,99.06) C20.1 ; SW2.12@81.872,99.255 v1(81.915,98.425) ; v1(84.963,72.39) 85.037,72.464 X1.4 85.187,73.611 85.187,73.961 X1.2@86.487,75.261 ; v3(85.725,92.202) 85.733,92.21 86.606,92.21 C15.1 ; v1(85.996,98.755) SW2.12@86.022,99.255 ; X1.2 X1.2@86.487,75.261 ; C10.1 C11.1 88.088,74.464 87.284,74.464 X1.2@86.487,75.261 ; v1(88.392,95.631) 90.397,95.631 90.907,96.141 J1.B1A12 ; ANT1.2@88.773,63.881 88.683,63.971 ANT1.2 88.773,66.522 v1(88.773,68.199) ; v3(88.773,91.186) C16.1 ; U6.6 v1(89.027,85.725) ; v1(89.916,80.391) 89.789,80.518 89.932,80.661 89.932,81.743 U6.2 ; v3(90.297,90.17) 90.297,90.959 R8.1 ; v1(91.313,72.644) 91.313,72.698 91.406,72.791 91.406,73.61 C3.1 ; v1(91.567,68.961) C9.1 ; v1(93.472,72.009) 93.472,71.955 93.676,71.751 93.676,71.043 C23.1 ; v3(93.599,84.963) 93.616,85.825 cw(c94.116,85.815) 93.62,85.878 U?.2 ; C22.1 v1(93.726,68.961) ; U2.9 v3(98.679,82.677) ; v1(96.901,88.646) R9.1 ; v3(97.282,94.996) 97.282,96.091 J1.A1B12 ; C7.1 97.393,71.043 98.067,71.717 98.26,71.717 v1(98.298,71.755) ; C6.1 v1(98.298,68.072) ; C8.1 v1(100.203,69.088) ; C2.1 100.314,79.298 100.927,79.911 100.927,79.972 v1(100.965,80.01) ; C4.1 100.322,82.107 100.457,82.242 v1(100.457,82.296) ; C5.1 v3(101.219,83.82) ; C12.1 v1(100.457,101.727) ; C1.1 v1(101.473,71.501) ; v1(100.584,89.916) C17.1 101.807,90.932 102.315,91.44 102.54,91.44 102.556,91.424 102.556,91.406 102.59,91.44 U5.2 ; v1(101.6,101.6) 101.654,101.6 101.774,101.48 102.752,101.48 SW1.12@102.827,101.405 ; SW1.12@106.977,101.405 107.052,101.48 108.03,101.48 108.277,101.727 v1(108.331,101.727) ; C19.1 107.565,90.655 v1(108.077,90.043) ; C18.1 107.442,88.673 v1(107.442,88.011) ; R11.1 108.381,100.364 109.2,100.364 109.293,100.457 v1(109.347,100.457) ; R12.1 109.42,72.39 109.547,72.263 v1(109.601,72.263) ; C13.1 108.762,74.184 109.122,73.824 109.561,73.824 v1(109.6,73.786) ; C14.1 108.812,91.059 v1(109.601,91.059)
  L1(sig) w0.8: v1(80.645,79.883) 3.MP2 ; 3.MP1 v3(80.645,92.075)
  other v1: 101.981,68.961 80.01,70.358 82.973,70.358 85.937,70.358 88.9,70.358 80.01,72.104 82.677,73.787 80.01,73.977 80.01,75.851 80.01,77.851 82.995,77.851 85.979,77.851 86.106,80.264 106.045,80.645 86.106,81.915 106.426,83.693 109.347,83.757 102.489,84.074 100.33,85.852 102.489,85.852 106.299,86.169 109.347,86.169 100.33,87.884 102.489,87.884 109.22,88.646 85.852,88.773 85.852,90.551 97.028,93.472 110.109,93.98 80.264,94.615 82.359,94.615 84.455,94.615 105.664,94.996 101.473,95.25 109.982,95.885 80.264,96.52 82.359,96.52 84.455,96.52 109.982,97.917
  other v3: 84.963,83.947
  other v4: 94.762,74.188 96.012,74.188 97.262,74.188 94.762,75.438 96.012,75.438 97.262,75.438 94.762,76.688 96.012,76.688 97.262,76.688
INT_ACC: U1.10 U3.16 | length 12.6
  L1(sig) w0.2: U1.10 98.637,74.188 98.762,74.063 98.858,74.063 99.319,73.602 v2(99.319,73.538) ; v2(104.394,80.264) 104.471,80.187 104.979,80.187 105.156,80.01 105.606,79.56 cw(c105.464,79.419) 105.664,79.419 U3.16
  L4(sig) w0.2: v2(99.319,73.538) 99.319,76.121 99.737,76.539 100.669,76.539 v2(104.394,80.264)
INT_GYR_GPIO9: C20.2 R10.1 SW2.34 U1.15 U3.12 | length 55.8
  L1(sig) w0.17: C20.2 80.783,101.053 81.432,101.165 81.872,101.405 86.022,101.405 86.462,101.165 86.984,100.926 R10.1 87.299,100.711 87.514,100.926 87.514,100.976 87.63,101.092 v2(87.63,101.727) ; U1.15 98.843,76.688 ccw(c98.843,76.858) 98.962,76.737 99.645,77.42 ; v2@99.861,77.189 99.786,77.277 cw(c99.914,77.388) 99.78,77.284 ccw(c99.645,77.18) 99.765,77.3 99.645,77.42 ; v2@99.862,77.188 v2(99.949,77.089) ; U3.12 103.557,76.98 cw(c103.557,77.15) 103.437,77.03 103.047,77.42 ccw(c102.927,77.3) 102.927,77.47 99.765,77.47 ccw(c99.765,77.3) 99.645,77.42
  L4(sig) w0.17: v2(87.63,101.727) 89.592,99.765 102.287,99.765 104.167,97.885 104.167,81.373 cw(c103.997,81.374) 104.117,81.254 v2(99.949,77.089)
LED_3V3_K: D3.K R11.2 | length 2.3
  L1(sig) w0.17: D3.K 107.125,97.969 107.125,98.158 108.281,99.314 R11.2
LED_A: D1.A U1.9 | length 6.5
  L1(sig) w0.17: U1.9 98.452,73.648 99.661,72.439 ccw(c99.78,72.56) 99.78,72.39 D1.A
LED_A_K: D1.K R12.2 | length 1.8
  L1(sig) w0.17: D1.K R12.2@107.712,72.39
LNA_IN: C23.2 L3.2 U1.1 | length 3.1
  L1(sig) w0.17: U1.1 94.262,72.45 ccw(c94.432,72.45) 94.311,72.33 94.462,72.18 cw(c94.341,72.06) 94.511,72.06 94.511,71.258 C23.2 L3.2
MCU_FSPICLK: R1.2 U1.12 | length 3.5
  L1(sig) w0.17: U1.12 98.859,75.188 cw(c98.859,75.018) 98.978,75.139 100.091,74.026 ccw(c100.21,74.147) 100.21,73.977 101.172,73.977 R1.2
MCU_UART0_RX: R3.2 U1.27 | length 3.8
  L1(sig) w0.17: R3.2 90.805,77.413 ccw(c90.975,77.413) 90.854,77.294 91.911,76.237 ccw(c92.03,76.358) 92.03,76.188 U1.27
MCU_UART0_TX: R5.2 U1.28 | length 5.3
  L1(sig) w0.17: R5.2 89.457,77.859 cw(c89.457,77.689) 89.576,77.81 91.648,75.738 ccw(c91.768,75.858) 91.768,75.688 U1.28
MCU_USB_D_N: U1.25 U?.3 | length 10.3
  L1(sig) w0.17: U1.25 93.322,77.188 cw(c93.322,77.673) 92.89,77.453 cw(c93.042,77.529) 92.885,77.463 cw(c93.465,77.704) 92.837,77.701 92.837,83.115 cw(c93.007,83.115) 92.886,83.234 94.53,84.878 94.53,86.148 U?.3
MCU_USB_D_P: U1.26 U?.1 | length 10.4
  L1(sig) w0.17: U?.1 92.496,86.014 ccw(c92.617,85.895) 92.447,85.895 92.447,77.704 ccw(c93.465,77.704) 93.347,76.693 U1.26
NetC18_2: C18.2 U5.4 | length 2.3
  L1(sig) w0.5: U5.4 105.69,90.49 105.74,90.44 105.74,90.215 106.384,89.571 106.384,88.823 C18.2
NetJ1_A5: J1.A5 R9.2 | length 6.8
  L1(sig) w0.17: J1.A5 95.357,91.841 96.321,90.877 96.686,90.877 R9.2
NetJ1_B5: J1.B5 R8.2 | length 5.7
  L1(sig) w0.17: R8.2@91.512,91.258 92.308,92.054 ccw(c92.187,92.173) 92.357,92.173 J1.B5
NetP1_2: 3.2 U6.4 | length 11.1
  L1(sig) w0.3: 3.2 85.377,86.497 85.397,86.477 86.878,86.477 87.63,85.725 87.63,83.361 87.806,83.185 90.629,83.185 90.805,83.361 90.805,84.176 U6.4
SPI_CLK: U1.22 U2.6 | length 4.1
  L1(sig) w0.17: U1.22 95.223,77.877 95.223,78.708 95.289,78.774 95.838,79.416 cw(c96.244,79.068) 95.892,79.471 96.593,80.083 ccw(c96.481,80.211) 96.651,80.211 U2.6
SPI_DI: U1.23 U2.5 | length 4
  L1(sig) w0.17: U1.23 94.762,78.817 cw(c94.932,78.817) 94.811,78.936 96.102,80.227 ccw(c95.981,80.346) 96.151,80.346 U2.5
SPI_DO: U1.24 U2.2 | length 8.5
  L1(sig) w0.3: U1.24 94.262,82.538 95.001,83.277 96.925,83.277 97.151,83.503 U2.2
SPI_NCS: U1.21 U2.1 | length 12.4
  L1(sig) w0.2: v2(95.631,86.106) 97.453,86.106 cw(c97.453,85.906) 97.601,86.041 cw(c97.301,85.77) 97.705,85.77 97.705,84.877 97.705,84.164 cw(c97.505,84.164) 97.701,84.124 U2.1 ; v2(95.758,78.486) 95.76,78.484 95.76,77.84 U1.21
  L4(sig) w0.2: v2(95.631,86.106) 95.694,86.042 95.694,78.549 v2(95.758,78.486)
SPI_NHOLD: U1.19 U2.7 | length 3.5
  L1(sig) w0.17: U1.19 96.762,78.493 cw(c96.932,78.493) 96.766,78.531 96.809,78.714 ; 96.809,78.714 ccw(c96.643,78.752) 96.813,78.759 96.793,79.272 cw(c96.963,79.279) 96.822,79.373 ccw(c96.68,79.466) 96.847,79.438 96.964,80.13 ccw(c96.481,80.211) 96.966,80.14 97.086,80.962 U2.7
SPI_NWP: U1.20 U2.3 | length 9.6
  L1(sig) w0.2: v2(96.244,79.068) 96.304,78.549 cw(c95.758,78.486) 96.308,78.486 96.308,78.258 96.287,78.237 96.287,77.863 U1.20 ; U2.3 96.701,84.377 96.765,84.56 cw(c97.001,84.477) 96.777,84.589 v2(97.155,85.344)
  L4(sig) w0.2: v2(96.244,79.068) 96.773,79.502 ccw(c96.646,79.657) 96.788,79.516 97.409,80.137 97.409,82.559 97.155,82.813 97.155,84.644 v2(97.155,85.344)
UART0_RX: R3.1 U6.3 | length 3
  L1(sig) w0.17: R3.1 90.927,78.973 U6.3
UART0_TX: R5.1 U6.1 | length 3
  L1(sig) w0.17: U6.1 89.027,78.986 R5.1
USB_D_N: J1.A7 J1.B7 U?.4 | length 10.5
  L1(sig) w0.17: J1.A7 93.857,94.996 ; U?.4 94.615,89.973 ccw(c94.445,89.973) 94.566,90.092 93.906,90.752 cw(c94.027,90.871) 93.857,90.871 93.857,94.996 ; J1.B7 94.792,96.526 94.792,96.278 94.792,95.37 cw(c94.622,95.37) 94.743,95.251 94.537,95.045 cw(c94.418,95.166) 94.418,94.996 93.857,94.996
USB_D_P: J1.A6 J1.B6 U?.6 | length 11.1
  L1(sig) w0.17: U?.6 92.715,89.363 cw(c92.885,89.363) 92.764,89.482 92.915,89.633 ccw(c92.794,89.752) 92.964,89.752 92.964,95.457 cw(c93.134,95.456) 93.08,95.618 ccw(c93.007,95.841) 93.242,95.841 93.242,96.406 cw(c93.412,96.406) 93.292,96.526 93.422,96.656 93.422,97.388 93.61,97.576 94.104,97.576 94.292,97.388 94.292,96.656 J1.A6 94.357,96.27 J1.A6@94.361,96.266
XTAL_IN: C10.2 R4.2 X1.1 | length 4
  L1(sig) w0.17: X1.1 86.487,73.411 87.516,72.382 88.695,72.382 ccw(c88.695,72.552) 88.814,72.431 89.232,72.849 ccw(c89.111,72.968) 89.281,72.968 R4.2
XTAL_N: C11.2 U1.29 X1.3 | length 9.4
  L1(sig) w0.17: X1.3 85.037,75.361 85.826,76.15 cw(c85.946,76.03) 85.946,76.2 87.232,76.2 cw(c87.232,76.03) 87.352,76.15 88.088,75.414 C11.2 88.374,75.199 ccw(c88.434,75.358) 88.434,75.188 U1.29
XTAL_P: R4.1 U1.30 | length 4.4
  L1(sig) w0.17: R4.1 89.331,74.422 89.597,74.688 U1.30
pads on no net: J1.A8 J1.B8 J1.MH J1.SH U1.4 U1.5 U3.1 U3.13

## Polygon pours and split planes (outlines as drawn)
GND on L2(GND) "GND_L02_P000" (solid, remove dead copper, pour order 0): 78.729,79.731 79.222,101.083 cw(c80.644,100.647) 79.692,101.79 80.137,102.235 cw(c81.363,100.85) 81.915,102.616 107.922,102.616 cw(c108.411,100.136) 109.82,102.234 109.965,102.089 cw(c109.088,99.969) 111.075,101.117 111.126,69.977 cw(c110.375,69.92) 110.253,69.176 105.678,69.176 ccw(c105.677,63.436) 103.361,68.688 102.33,67.657 88.009,67.657 cw(c88.66,68.307) 87.74,68.307 87.359,68.688 ccw(c85.827,67.158) 85.826,69.323 81.39,69.323 cw(c81.278,73.04) 78.729,70.333 78.729,73.684
GND on L3(GND) "GND_L03_P001" (solid, pour order 1): 83.566,102.616 84.074,102.489 108.549,102.489 cw(c108.549,99.949) 110.345,101.745 111.125,100.965 111.125,69.85 110.363,69.088 104.521,69.088 ccw(c104.521,67.249) 103.22,68.549 102.362,67.691 cw(c102.055,67.997) 102.055,67.564 88.011,67.564 ccw(c87.091,67.564) 87.742,68.214 86.614,69.342 80.808,69.342 cw(c80.808,71.882) 79.012,70.086 78.867,70.231 ccw(c78.254,70.844) 79.121,70.844 79.121,101.219 80.391,102.489 cw(c80.698,102.182) 80.698,102.616 83.693,102.616
GND on L1(sig) "GND_L1" (solid, pour order 2): 78.994,101.039 cw(c79.428,101.039) 79.121,101.346 80.069,102.294 cw(c81.153,101.21) 81.153,102.743 108.966,102.743 cw(c108.966,100.903) 110.267,102.204 110.998,101.473 110.998,70.157 ccw(c111.432,70.157) 111.125,69.85 110.363,69.088 104.193,69.088 ccw(c104.193,68.654) 103.886,68.961 102.885,67.96 cw(c102.235,68.611) 102.235,67.691 88.497,67.691 ccw(c88.497,66.824) 87.884,67.437 cw(c88.191,67.744) 87.757,67.744 87.757,68.58 cw(c87.757,69.806) 86.89,68.939 86.614,69.215 ccw(c86.307,68.908) 86.307,69.342 80.645,69.342 cw(c80.645,71.795) 78.911,70.06 78.867,70.104 78.867,80.772 cw(c78.56,80.465) 78.994,80.465 78.994,70.993
GND on L4(sig) "GND_L04_P003" (solid, pour order 3): 78.994,88.646 79.121,88.773 79.121,101.727 cw(c80.137,101.727) 80.137,102.743 109.093,102.743 cw(c109.093,100.711) 111.125,100.711 111.125,70.231 cw(c109.982,70.231) 109.982,69.088 104.013,69.088 ccw(c104.013,68.326) 103.251,68.326 cw(c102.743,68.326) 102.743,67.818 88.138,67.818 87.391,68.565 cw(c88.042,69.215) 87.122,69.215 80.681,69.215 cw(c80.681,71.755) 78.885,69.959 78.867,69.977 ccw(c78.56,70.284) 78.994,70.284

## Keep-outs
Keep-Out Layer:
  lines w0.254: 86.106,68.707 cw(c86.106,67.437) 87.376,67.437 87.376,61.976 ccw(c88.646,61.976) 88.646,60.706 102.235,60.706 ccw(c102.235,61.976) 103.505,61.976 103.505,67.437 cw(c104.775,67.437) 104.775,68.707 108.839,68.707 109.601,68.707 110.108,68.707 ccw(c110.108,69.977) 111.378,69.977 111.378,70.357 111.505,100.712 ; 86.106,68.834 81.026,68.834 79.949,68.834 cw(c79.949,70.104) 78.679,70.104 78.679,70.419 78.867,100.616 78.867,101.727 cw(c80.137,101.727) 80.137,102.997 82.01,102.997 ; 111.506,100.457 111.506,100.847 ccw(c109.356,100.847) 109.356,102.997 108.394,102.997 107.569,102.997 106.426,102.997 82.01,102.997 ; 82.01,102.997 82.01,102.997 ; 82.01,102.997 82.01,102.997 ; 82.01,102.997 82.01,102.997

## Text inside footprints (layer, text, board x,y; h text height)
D1: Mechanical 13 "+" at 103.851,71.782 h0.5 r180
D3: Mechanical 13 "+" at 108.886,98.271 h0.5